# Altium PCB node.PcbDoc
Units mil, origin at the board's own origin, x right, y up, seen from the top; angles counter-clockwise.
Board outline 3500 x 1980 mil, 2 copper layers (Top Layer, Bottom Layer); 35 components, 21 nets, 172 pads, 74 vias.
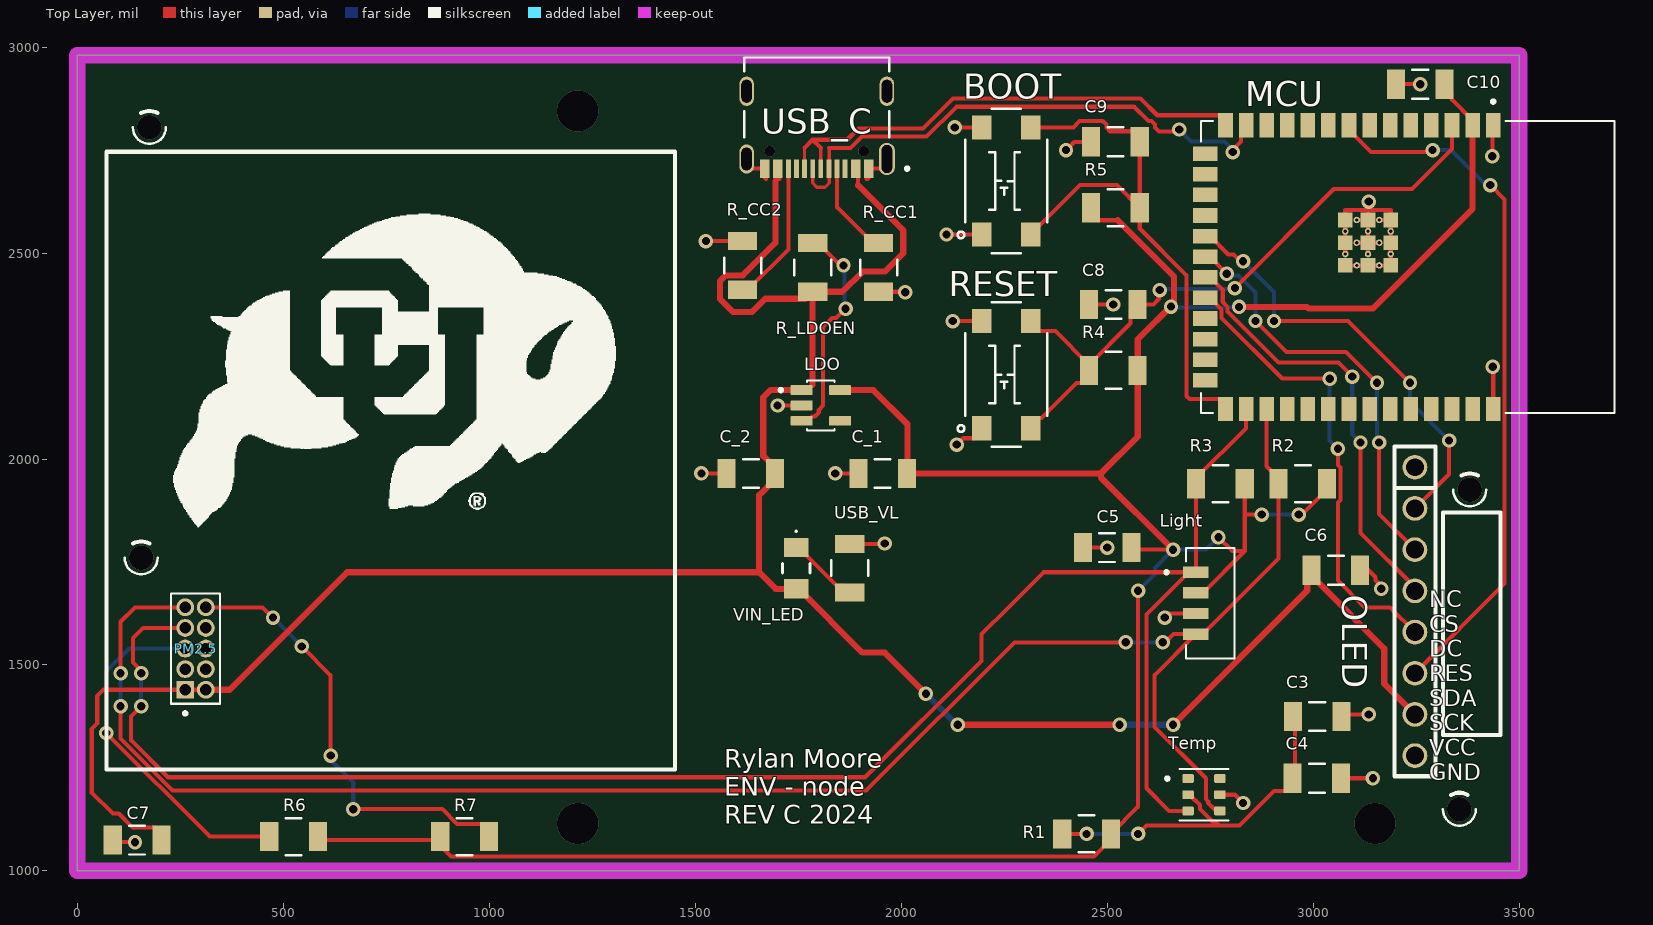
[diagram p0: Top Layer view]
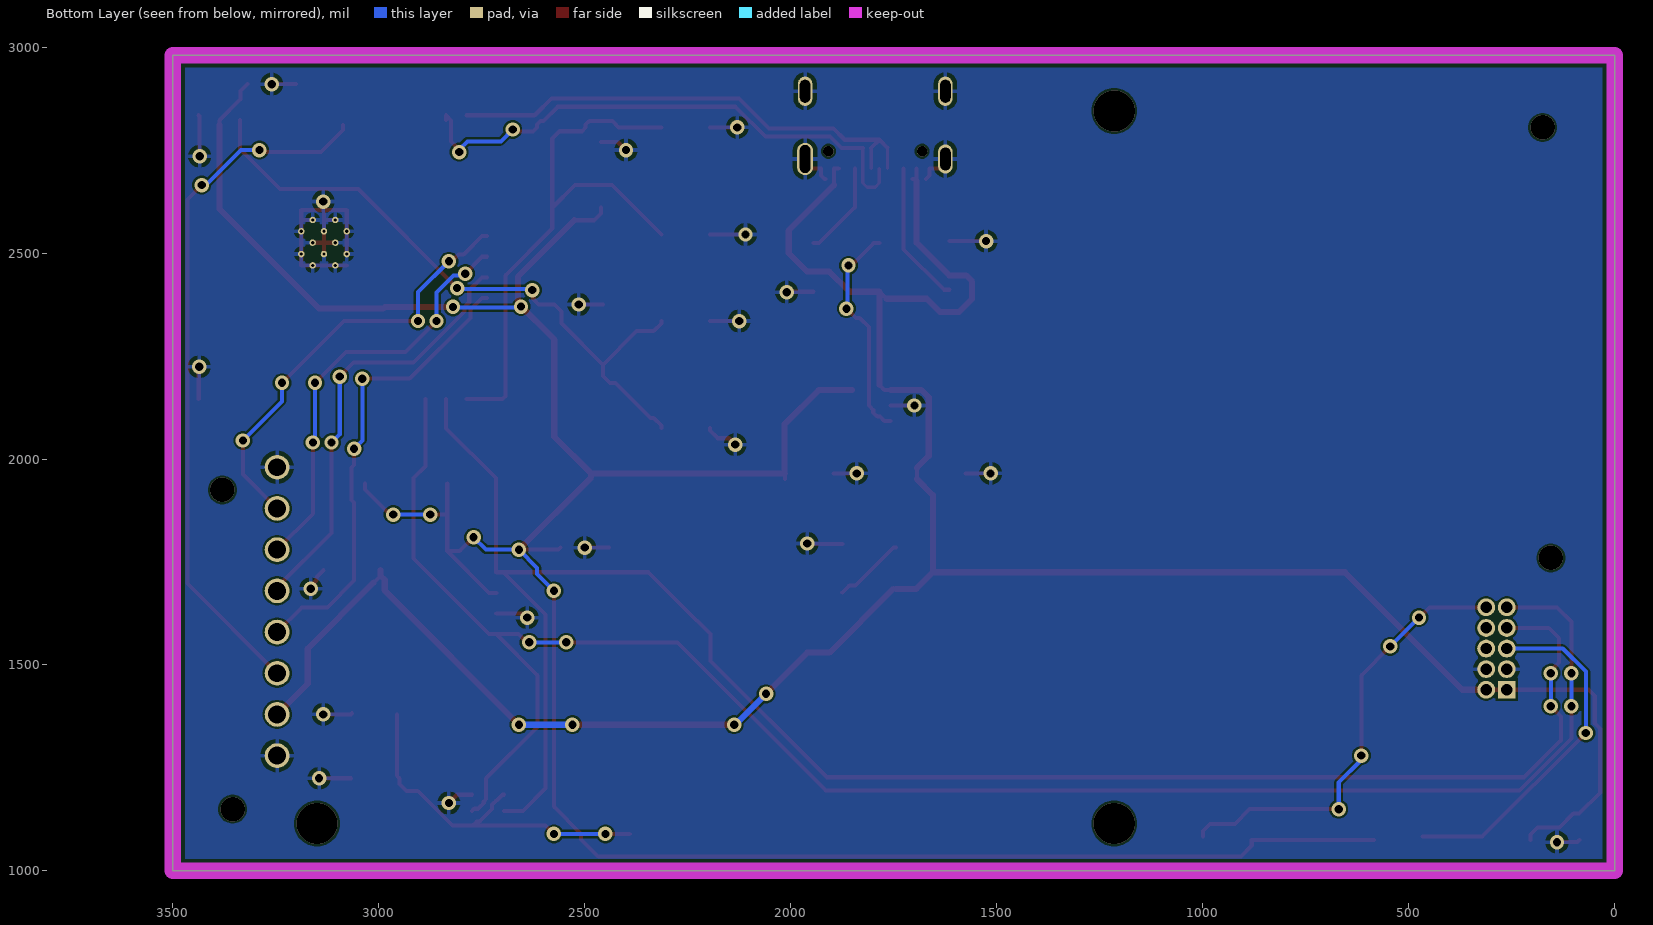
[diagram p1: Bottom Layer view, seen from below]
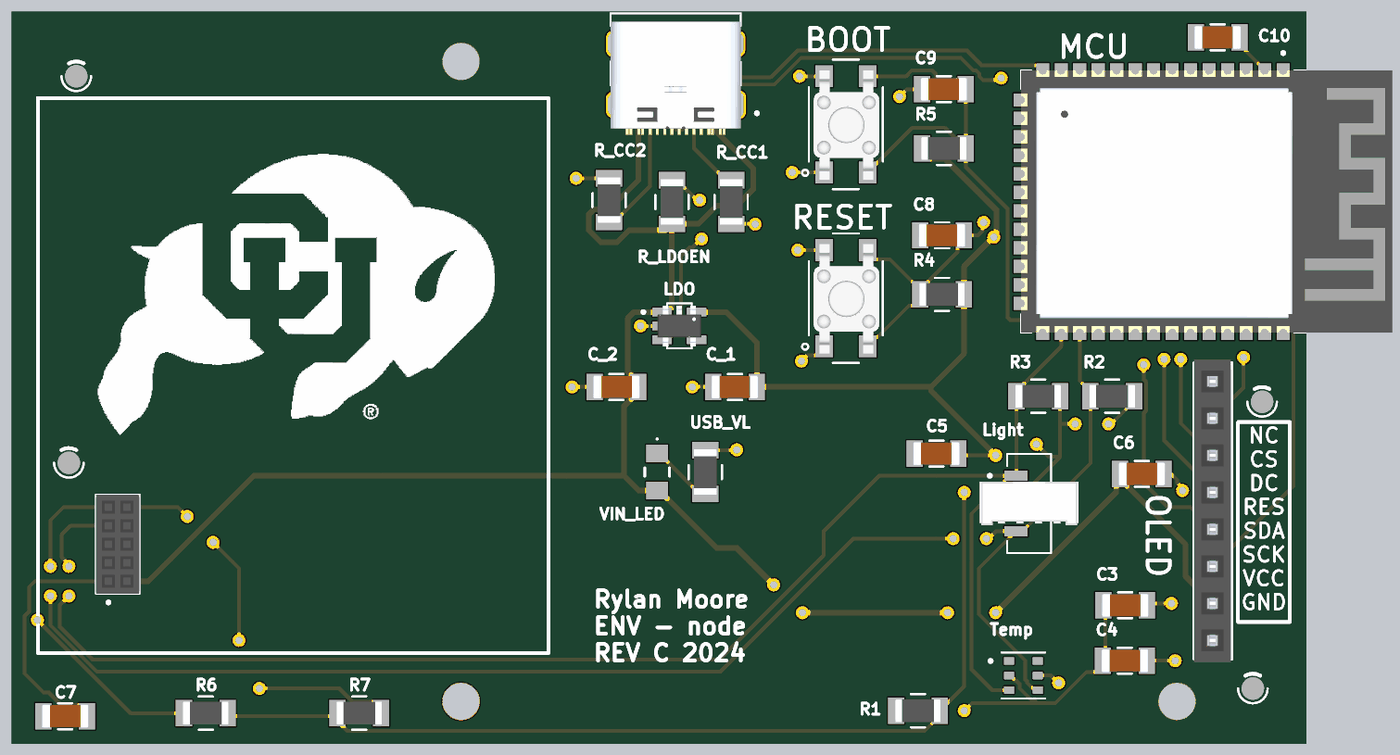
[diagram p2: 3D render of the assembled board from above, using the file's embedded part models]

## Layer stack, top to bottom
Top Solder: solder mask 0.4, Solder Resist, Dk 3.5
Top Layer: signal copper 1.4
Dielectric 1: dielectric 12.6, FR-4, Dk 4.8
Bottom Layer: signal copper 1.4
Bottom Solder: solder mask 0.4, Solder Resist, Dk 3.5

## Board outline
0,1000 3500,1000 3500,2980 0,2980

## Design rules (kind name [scope] priority, off if disabled: settings)
Clearance Clearance_1 [OnMid vs OnMid] p1: gap=5 ignorepadtopadclearanceinfootprint=FALSE sourcerule=38 cellrowname=All cellrowtype=0 cellcolname=All cellcoltype=0 innerlayers=TRUE
Clearance Clearance_2 [(ExistsOnLayer('Top Layer') Or ExistsOnLayer('Bottom Layer')) vs (ExistsOnLayer('Top Layer') Or ExistsOnLayer('Bottom Layer'))] p2: gap=5 ignorepadtopadclearanceinfootprint=FALSE sourcerule=38 cellrowname=All cellrowtype=0 cellcolname=All cellcoltype=0 outerlayers=TRUE
Clearance [All] p3: gap=10 ignorepadtopadclearanceinfootprint=FALSE ismatrix=TRUE
PolygonConnect [All] p1: connectstyle=Relief reliefconductorwidth=10 reliefentries=4 polygonreliefangle="90 Angle" airgapwidth=10
RoutingVias RoutingViaStyle_1 [All] p1: holewidth=15 width=22 viastyle="Through Hole" minholewidth=10 minwidth=10 maxholewidth=30 maxwidth=40
RoutingVias [All] p2: holewidth=28 width=50 viastyle="Through Hole" minholewidth=28 minwidth=50 maxholewidth=28 maxwidth=50
SolderMaskExpansion [All] p1: expansion=4 istentingtop=FALSE
Width MaxMinWidth_1 [All] p1: maxlimit=20 minlimit=6 preferedwidth=10 minimp=50.000000 maximp=50.000000 favimp=50.000000
Width [All] p2: maxlimit=10 minlimit=10 preferedwidth=10
30 further rules are at their usual default settings.

## Components (designator, comment, footprint, x,y, rotation, side; value= is the part's Value field where it differs from the comment)
BOOT "TL3305AF160QG" Switch_JLC 2255,2675 r90 top
C3 "10uF" 1206_Passive_Capacitor 3010,1375 r0 top
C4 "10uF" 1206_Passive_Capacitor 3009,1225 r0 top value=0.1uF
C5 "10uF" 1206_Passive_Capacitor 2500,1785 r0 top value=0.1uF
C6 "10uF" 1206_Passive_Capacitor 3055,1730 r180 top value=0.1uF
C7 "10uF" 1206_Passive_Capacitor 145,1075 r0 top value=0.1uF
C8 "10uF" 1206_Passive_Capacitor 2515,2375 r0 top value=0.1uF
C9 "10uF" 1206_Passive_Capacitor 2520,2770 r0 top value=0.1uF
C10 "10uF" 1206_Passive_Capacitor 3260,2910 r0 top value=22uF
C_1 "22uF" 1206_Passive_Capacitor 1955,1965 r0 top
C_2 "22uF" 1206_Passive_Capacitor 1635,1965 r0 top
H1 "Stencil Hole" AlignmentHole_1.5mm 3380,1925 r0 top
H2 "Stencil Hole" AlignmentHole_1.5mm 175,2805 r0 top
H3 "Stencil Hole" AlignmentHole_1.5mm 155,1760 r0 top
H4 "Stencil Hole" AlignmentHole_1.5mm 3355,1150 r0 top
LDO "AP2112K-3.3TRG1" SOT95P285X140-5N 1805,2130 r0 top
Light "VEML7700-TT" XDCR_VEML7700-TT 2750.43,1650 r0 top
MCU "ESP32-S3-WROOM-1-N4R2" XCVR_ESP32-S3-WROOM-1-N4R2 3230,2466.04 r270 top
OLED "PPTC081LFBN-RC" "8_PIN_100MIL - Female" 3246.99,1980 r270 top value=Female
PM2.5 "20021311-00010T4LF" AMPHENOL_20021311-00010T4LF 287,1540 r270 top
R1 "220 Ohm" 1206_Passive_Resitor 2450,1090 r0 top
R2 "10k" 1206_Passive_Resitor 2975,1940 r0 top value=10KOhm
R3 "10k" 1206_Passive_Resitor 2775,1940 r0 top value=10KOhm
R4 "10k" 1206_Passive_Resitor 2515,2215 r0 top value=10KOhm
R5 "220 Ohm" 1206_Passive_Resitor 2520,2610 r0 top value=10kOhm
R6 "220 Ohm" 1206_Passive_Resitor 525,1083.38 r0 top value=10kOhm
R7 "220 Ohm" 1206_Passive_Resitor 940,1083.38 r0 top value=10kOhm
R_CC1 "100KOhm" 1206_Passive_Resitor 1945,2465 r90 top value=5.1KOhm
R_CC2 "100KOhm" 1206_Passive_Resitor 1615,2470 r90 top value=5.1kOhm
R_LDOEN "1 Ohm" 1206_Passive_Resitor 1785,2465 r90 top value=10kOhm
RESET "TL3305AF160QG" Switch_JLC 2255,2205 r90 top
Temp "AHT20" PSON100P300X300X110-6N 2735,1185 r0 top
USB_C "CSP-USC16-TR" VALCON_CSP-USC16-TR 1795,2705 r180 top
USB_VL "100Ohm" 1206_Passive_Resitor 1875,1735 r90 top value=1kOhm
VIN_LED "CD1206-S01575" BOUR-CD1206-S01575-2_L 1745,1735 r90 top

## Footprints (in the part's own frame and the unit in brackets; to place one, negate y for a bottom-side part, rotate by r counter-clockwise, add the part's x,y. Pads: shape width x height; smd on the part's side, far side on the other; paste and mask are expansions set on the pad)
"8_PIN_100MIL - Female" [mil]
  round 60 hole 43.31: 1(0,0) 2(100,0) 3(200,0) 4(300,0) 5(400,0) 6(500,0) 7(600,0) 8(700,0)
  silkscreen extent -50,-50 750,50, body extent -60,-51 760,49, height 335
1206_Passive_Capacitor [mil]
  rect 44x71 smd: 1(-59,0) 2(59,0)
  silkscreen extent -19,-35 19,35, body extent -63,-31 63,32, height 50
1206_Passive_Resitor [mil]
  rect 44x71 smd: 1(-59,0) 2(59,0)
  silkscreen extent -19,-45 19,45, body extent -61,-31 61,31, height 26
AlignmentHole_1.5mm [mm]
  round 1.55 on Top Paste paste+0 mask+0: 1(0,0)
  silkscreen extent -1.02,-1.01 1.02,1.01
AMPHENOL_20021311-00010T4LF [mm]
  rect 1.1x1.1 hole 0.7: 1(2.54,-0.635)
  round 1.1 hole 0.7: 2(2.54,0.635) 3(1.27,-0.635) 4(1.27,0.635) 5(0,-0.635) 6(0,0.635) 7(-1.27,-0.635) 8(-1.27,0.635) 9(-2.54,-0.635) 10(-2.54,0.635)
  silkscreen extent -3.4,-1.5 4.1,1.5, body extent -3.4,-1.5 3.4,1.5, height 4.4
BOUR-CD1206-S01575-2_L [mm] "Molded Diode, 2-Leads, Body 3.4x1.7mm, IPC High Density"
  rect 1.2x1.5 smd: 1(-1.275,0) 2(1.275,0)
  silkscreen extent -0.28,-0.85 2.32,0.85, body extent -1.7,-0.85 1.7,0.85, height 0.95
PSON100P300X300X110-6N [mm]
  rrect25% 0.71x0.53 smd: 1(-0.985,1) 2(-0.985,0) 3(-0.985,-1) 4(0.985,-1) 5(0.985,0) 6(0.985,1)
  silkscreen extent -2.35,-1.59 1.5,1.59
SOT95P285X140-5N [mm]
  rrect15% 1.35x0.6 smd: 1(-1.185,0.95) 2(-1.185,0) 3(-1.185,-0.95) 4(1.185,-0.95) 5(1.185,0.95)
  silkscreen extent -2.57,-1.55 0.85,1.55, body extent -1.5,-1.4 1.5,1.4, height 1.4
Switch_JLC [mm]
  rect 1.5x1.2 smd: 1(-3.3,1.5) 2(3.3,1.5) 3(-3.3,-1.5) 4(3.3,-1.5)
  silkscreen extent -4.44,-2.54 4.45,3, body extent -3.8,-2.29 3.7,2.21, height 3.7
VALCON_CSP-USC16-TR [mm]
  rect 0.3x1.14 smd: A1(-3.35,0) A4(-2.55,0) A5(-1.25,0) A6(-0.25,0) A7(0.25,0) A8(1.25,0) A9(2.55,0) A12(3.35,0) B1(3.05,0) B4(2.25,0) B5(1.75,0) B6(0.75,0) B7(-0.75,0) B8(-1.75,0) B9(-2.25,0) B12(-3.05,0)
  oval 1x2 hole 0.65 slot 1.72 at 90 deg: S1(-4.325,-0.59)
  oval 0.9x1.8 hole 0.65 slot 1.4 at 90 deg: S2(4.325,-0.59) S3(-4.325,-4.77) S4(4.325,-4.77)
  round 0.65 hole 0.65 unplated: ""(-2.89,-1.07) ""(2.89,-1.07)
  silkscreen extent -5.68,-6.86 4.47,0.1, body extent -4.47,-6.28 4.47,1.47, height 3.26
XCVR_ESP32-S3-WROOM-1-N4R2 [mm]
  rect 1.5x0.9 smd: 1(-8.75,5.26) 2(-8.75,3.99) 3(-8.75,2.72) 4(-8.75,1.45) 5(-8.75,0.18) 6(-8.75,-1.09) 7(-8.75,-2.36) 8(-8.75,-3.63) 9(-8.75,-4.9) 10(-8.75,-6.17) 11(-8.75,-7.44) 12(-8.75,-8.71) 13(-8.75,-9.98) 14(-8.75,-11.25) 27(8.75,-11.25) 28(8.75,-9.98) 29(8.75,-8.71) 30(8.75,-7.44) 31(8.75,-6.17) 32(8.75,-4.9) 33(8.75,-3.63) 34(8.75,-2.36) 35(8.75,-1.09) 36(8.75,0.18) 37(8.75,1.45) 38(8.75,2.72) 39(8.75,3.99) 40(8.75,5.26)
  rect 0.9x1.5 smd: 15(-6.985,-12.5) 16(-5.715,-12.5) 17(-4.445,-12.5) 18(-3.175,-12.5) 19(-1.905,-12.5) 20(-0.635,-12.5) 21(0.635,-12.5) 22(1.905,-12.5) 23(3.175,-12.5) 24(4.445,-12.5) 25(5.715,-12.5) 26(6.985,-12.5)
  rect 0.9x0.9 smd: 41_1(-1.5,-2.46) 41_2(-2.9,-2.46) 41_3(-0.1,-2.46) 41_4(-2.9,-3.86) 41_5(-1.5,-3.86) 41_6(-0.1,-3.86) 41_7(-2.9,-1.06) 41_8(-1.5,-1.06) 41_9(-0.1,-1.06)
  round 0.4 hole 0.2 mask+0: 41_10(-1.5,-1.76) 41_11(-2.9,-1.76) 41_12(-0.1,-1.76) 41_13(-2.9,-3.16) 41_14(-1.5,-3.16) 41_15(-0.1,-3.16) 41_16(-2.2,-1.06) 41_17(-0.8,-1.06) 41_18(-2.2,-2.46) 41_19(-0.8,-2.46) 41_20(-2.2,-3.86) 41_21(-0.8,-3.86)
  silkscreen extent -10.3,-12.75 9,12.75, body extent -9,-12.75 9,12.75, height 3.25
XDCR_VEML7700-TT [mm]
  rect 1.6x0.7 smd: 1(-0.9,1.905) 2(-0.9,0.635) 3(-0.9,-0.635) 4(-0.9,-1.905)
  silkscreen extent -2.8,-3.4 1.5,3.4, body extent -3.4,-1.5 3.4,1.5, height 1.35

## Part data
BOOT RESET: library part SW_Push_Button_JLC, "Tactile Switch SPST-NO Top Actuated Surface Mount", LCSC Part#=C2837550, MFR Part #=KH-4.5X4.5X4.3H-STM, Datasheet=https://datasheet.lcsc.com/lcsc/2106081532_Shenzhen-Kinghelm-Elec-KH-4.5X4.5X4.3H-STM_C2837550.pdf, Type=Extended
C3 C4 C5 C6 C7 C8 C9 C10: library part C_10uF_1206, "10uF ±10% 50V X5R 1206 Multilayer Ceramic Capacitors MLCC - SMD/SMT RoHS", LCSC Part#=C13585, MFR Part #=CL31A106KBHNNNE, Datasheet=https://datasheet.lcsc.com/lcsc/1810221112_Samsung-Electro-Mechanics-CL31A106KBHNNNE_C13585.pdf, Type=Basic
C_1 C_2: library part C_22uF_1206, "22uF ±10% 25V X5R 1206 Multilayer Ceramic Capacitors MLCC - SMD/SMT RoHS", LCSC Part#=C12891, MFR Part #=CL31A226KAHNNNE, Datasheet=https://datasheet.lcsc.com/lcsc/1811031514_Samsung-Electro-Mechanics-CL31A226KAHNNNE_C12891.pdf, Type=basic
H1 H2 H3 H4: library part H_StencilAllignment_1.5mm, "Stencil Allignment hole for use with 1.5mm pin"
LDO: "AP2112 Series 0.6 A 3.3 V Fixed Output SMT LDO Linear Regulator - SOT23-5", Package=None, Availability=Unavailable, MF="{'manufacturer': u'Diodes Inc.'}", MP=AP2112K-3.3TRG1, Price=None
Light MCU PM2.5 USB_C: Package=None, Availability=Unavailable, Price=None
  Light: MF="{'manufacturer': u'Vishay Semiconductor'}", MP=VEML7700-TT
  MCU: MF="{'manufacturer': u'Espressif Systems'}", MP=ESP32-S3-WROOM-1-N4R2
  PM2.5: MF="{'manufacturer': u'Amphenol ICC'}", MP=20021311-00010T4LF
  USB_C: MF="{'manufacturer': u'Valcon'}", MP=CSP-USC16-TR
OLED: library part JF_8_PIN_FEMALE, "8 Position Header Connector 0.100\" (2.54mm) Through Hole Tin", LCSC Part#=C27438, Digikey Link=https://www.digikey.com/product-detail/en/PPTC081LFBN-RC/S7006-ND/810147/?itemSeq=304982354, MFR Part #=PPTC081LFBN-RC, Type=Extended
R1 R5 R6 R7: library part R_0Ohm_1206, "CHIP RESISTOR - SURFACE MOUNT 0OHMS ±1% 1/4W 1206 ROHS", LCSC Part#=C17888, MFR Part #=1206W4F0000T5E, Datasheet=https://datasheet.lcsc.com/szlcsc/Uniroyal-Elec-1206W4F0000T5E_C17888.pdf, Mouser link=https://www.mouser.com/ProductDetail/Royalohm/1206W4F0000T5E?qs=e8oIoAS2J1Thbopin%252BsagQ%3D%3D, Type=Basic
R2 R3 R4: library part R_10KOhm_1206, "10 kOhms ±5% 0.25W, 1/4W Chip Resistor 1206 (3216 Metric) Automotive AEC-Q200 Thick Film", LCSC Part#=C17902, MFR Part #=RMCF1206FT10K0, Digikey Link=https://www.digikey.com/en/products/detail/stackpole-electronics-inc/RMCF1206FT10K0/1759669, Type=Basic
R_CC1 R_CC2: library part R_100KOhm_1206, "100kΩ ±1% 0.25W ±100ppm/℃ 1206 Chip Resistor - Surface Mount RoHS", LCSC Part#=C17900, MFR Part #=1206W4F1003T5E, Datasheet=https://datasheet.lcsc.com/lcsc/1810301421_UNI-ROYAL-Uniroyal-Elec-1206W4F1003T5E_C17900.pdf, Type=Basic
R_LDOEN: library part R_1Ohm_1206, "1Ω ±5% 0.25W ±400ppm/℃ 1206 Chip Resistor - Surface Mount RoHS", LCSC Part#=C1409, MFR Part #=1206W4J010JT5E, Datasheet=https://datasheet.lcsc.com/lcsc/1810301410_UNI-ROYAL-Uniroyal-Elec-1206W4J010JT5E_C1409.pdf, Type=Extended
Temp: "Temperature and Humidity sensor", Package=None, Availability=Unavailable, MF="{'manufacturer': u'Asair'}", MP=AHT20, Price=None
USB_VL: library part R_100Ohm_1206, "100Ω ±1% 0.25W ±100ppm/℃ 1206 Chip Resistor - Surface Mount RoHS", LCSC Part#=C17901, MFR Part #=1206W4F1000T5E, Datasheet=https://datasheet.lcsc.com/lcsc/2206010145_UNI-ROYAL-Uniroyal-Elec-1206W4F1000T5E_C17901.pdf, Type=Basic
VIN_LED: library part CMP-0583-00001-2, "75 V Small Signal Switching Diode, 150 mA, 2.5 uA, 1026 Molded Package, RoHS, Tape and Reel", Average Forward Current="150 mA", Capacitance Between Terminals (Max.)="3 pF", Forward Voltage (Max.)="1.00 V", Manufacturer=Bourns, Reverse Current (Max.)="2.5 uA", Reverse Voltage="75 V", ComponentLink1Description="Manufacturer URL", ComponentLink1URL=http://www.bourns.com/, ComponentLink2Description=Datasheet, ComponentLink2URL=http://www.bourns.com/data/global/pdfs/CD1206_S01575.pdf, ComponentLink3Description="Package Specification", ComponentLink3URL=http://www.bourns.com/data/global/pdfs/CD1206_S01575.pdf, DatasheetVersion="Rev. 06/11", Mounting Technology="Surface Mount", PackageDescription="2-Pin SMD, Body 3.2 x 1.5 mm", PackageReference=CD1206-S01575-2, Packing="Tape and Reel", PartNumber=CD1206-S01575, Reverse Recovery Time (Max.)="4 nS", RoHS=TRUE

## Via types
v1: diameter 35, hole 20, Top Layer to Bottom Layer, 67 vias
v2: diameter 59.06, hole 59.06, Top Layer to Bottom Layer, 4 vias
v3: diameter 100, hole 100, Top Layer to Bottom Layer, 3 vias

## Nets (pads, with @x,y where several pads share a name; then routed paths per layer and width w, separated by ;. In a path a pad name is that pad's centre, name@x,y a point inside that pad or via, vN(x,y) a via of type N, cw(c..) or ccw(c..) an arc to the next point about the centre after c; other vN are vias at no path point)
3.3V: C5.2 C10.2 C_1.2 LDO.5 Light.2 MCU.2 R1.2 R2.2 R3.2 R4.2 R5.1 R6.2 R7.1 | length 6656.4
  Top Layer w10: R6.2@584,1075 881,1075 881,1061.5 907.5,1035 2467.5,1035 2509,1076.5 R1.2 2575,1156 v1(2575,1680) ; C_1.2@2014,1951.5 C_1.2 C_1.2@2015,1966 ; R5.1 2461,2596.5 2478,2579.5 2525.5,2579.5 ; C5.2 2564,1780 v1(2660,1780) ; Light.2 2732.72,1675 2834,1776.28 ; v1(2770,1810) 2803.72,1776.28 2834,1776.28 ; R3.2 2834,1865 ; v1(2875,1865) 2834,1865 ; v1(2965,1865) 2972.5,1865 3034,1926.5 R2.2 ; C10.2 3336,2893 3336,2873.43 3387.09,2822.34 MCU.2 ; 2834,1776.28 2834,1865
  Top Layer w15: LDO.5 1932.6,2167.4 2015,2085 C_1.2@2015,1966 ; C_1.2 2485,1965 ; 2525.5,2579.5 2662.5,2442.5 2662.5,2378.73 2574,2290.23 R4.2 2574,2054 2485,1965 ; v1(2660,1780) 2485,1955 2485,1965 ; v1(2819.9,2369.12) 2985.01,2369.12 2989.13,2365 3145,2365 3387.09,2607.09 MCU.2
  Bottom Layer w10: v1(2575,1680) 2615.81,1720.81 2615.81,1735.81 v1(2660,1780) 2740,1780 v1(2770,1810) ; v1(2655,2370) 2657.5,2367.5 2818.28,2367.5 v1(2819.9,2369.12) ; v1(2875,1865) v1(2965,1865)
BOOT: BOOT.3 BOOT.4 C9.2 MCU.27 R5.2 | length 1401.4
  Top Layer w10: BOOT.3 2433.98,2665 2524,2665 R5.2 ; BOOT.4 2418.14,2804.92 2424,2810.78 2424,2811.71 2432.79,2820.5 2489.21,2820.5 2498,2811.71 2498,2804.64 2507.14,2795.5 2562,2795.5 2579,2778.5 C9.2 R5.2 ; MCU.27@2787.09,2145.51 2699.49,2145.51 2692.5,2152.5 2692.5,2446 2579,2559.5 R5.2
D+: MCU.14 USB_C.A6 USB_C.B6 | length 1216.6
  Top Layer w8: USB_C.B6 1765.47,2755.47 ; USB_C.A6 1804.84,2755.16
  Top Layer w10: 1765.47,2755.47 1785,2775 ; 1804.84,2755.16 1785,2775 ; MCU.14@2787.09,2834.49 2621.51,2834.49 2581,2875 2125.75,2875 2053.35,2802.6 1896.66,2802.6 1869.06,2775 1785,2775
D-: MCU.13 USB_C.A7 USB_C.B7 | length 1369
  Top Layer w8: USB_C.A7 1785,2704.84 1785,2670 1795,2660 1815,2660 1825,2670 1825,2755
  Top Layer w10: 1825,2755 1877.35,2755 1904.94,2782.6 2061.64,2782.6 2134.04,2855 2565.64,2855 2600.14,2820.5 2607.21,2820.5 2616,2811.71 2616,2804.64 2625.68,2794.96 2669.96,2794.96 v1(2674.98,2799.98) v1@2680,2805 ; v1(2805,2745) 2805,2751.76 2824.37,2771.13 2824.37,2821.77 2837.09,2834.49 MCU.13@2837.09,2822.68
  Bottom Layer w10: v1(2674.98,2799.98) 2703.88,2771.08 2785.12,2771.08 2805,2751.2 v1(2805,2745)
DS_CLK: MCU.8 OLED.6 | length 1694.7
  Top Layer w10: MCU.8 3087.09,2798.72 3140.8,2745 v1@3300,2745 ; OLED.6 3464.8,1697.81 3464.8,2630.2 v1(3430,2665)
  Bottom Layer w10: v1(3290,2750) 3335,2750 v1@3415,2670
DS_CS: MCU.19 OLED.2 | length 1064.3
  Top Layer w10: MCU.19 2749.68,2541.04 2793.85,2496.88 2806.36,2496.88 2823.24,2480 v1(2830,2480) ; v1(2905,2335) 3085,2335 v1(3235,2185) ; OLED.2 3330,1963.01 v1(3330,2045)
  Bottom Layer w10: v1(2830,2480) 2905,2405 v1(2905,2335) ; v1(3235,2185) 3235,2140 v1(3330,2045)
DS_DATA: MCU.22 OLED.5 | length 1130.4
  Top Layer w10: MCU.22 2749.68,2391.04 2765.51,2375.22 2765.51,2374.8 2777.4,2362.9 2777.4,2342.6 2925,2195 v1(3040,2195) ; v1(3060,2025) 3060,1985.64 3066,1979.64 3066,1900.36 3060,1894.36 3060,1705 3125.04,1639.96 3187.03,1639.96 OLED.5
  Bottom Layer w10: v1(3040,2195) 3040,2045 v1@3055,2030
DS_DC: MCU.20 OLED.3 | length 1022.8
  Top Layer w10: MCU.20 2749.68,2491.04 2790,2450.73 v1(2790,2450) ; v1(2860,2335) 2935,2260 3080,2260 v1(3155,2185) ; v1(3160,2040) 3160,1866.99 OLED.3
  Bottom Layer w10: v1(2790,2450) 2794.78,2445.22 2818.67,2445.22 2860,2403.89 v1(2860,2335) ; v1(3155,2185) 3155,2050 v1@3160,2045
DS_RS: MCU.21 OLED.4 | length 1056.6
  Top Layer w10: MCU.21 2749.68,2441.04 2780.51,2410.22 2780.51,2381.01 2792.4,2369.11 2792.4,2357.73 2916.3,2233.83 3061.17,2233.83 v1(3095,2200) ; v1(3115,2040) 3115,1820.64 3246.99,1688.65 OLED.4
  Bottom Layer w10: v1(3095,2200) 3095,2060 v1@3110,2045
GND: BOOT.1 BOOT.2 C3.2 C4.2 C5.1 C6.1 C7.1 C8.1 C9.1 C10.1 C_1.1 C_2.1 LDO.2 Light.3 MCU.1 MCU.40 MCU.41_1 MCU.41_2 MCU.41_3 MCU.41_4 MCU.41_5 MCU.41_6 MCU.41_7 MCU.41_8 MCU.41_9 MCU.41_10 MCU.41_11 MCU.41_12 MCU.41_13 MCU.41_14 MCU.41_15 MCU.41_16 MCU.41_17 MCU.41_18 MCU.41_19 MCU.41_20 MCU.41_21 OLED.1 OLED.8 PM2.5.3 PM2.5.4 R_CC1.1 R_CC2.2 RESET.1 RESET.2 Temp.5 USB_C.A1 USB_C.A12 USB_C.B1 USB_C.B12 USB_C.S1 USB_C.S2 USB_C.S3 USB_C.S4 USB_VL.2 | length 2404.4
  Top Layer w10: C7.1 91,1070 v1(140,1070) ; v1(1515,1965) C_2.1 ; v1@1525,2530 v1(1526,2529) R_CC2.2 ; USB_C.S2 1624.72,2717.39 1637.12,2705 USB_C.A12 1663.11,2688.46 1671.57,2680 1672.11,2680 ; v1(1700,2130) LDO.2 ; v1(1840,1965) C_1.1 ; USB_VL.2 1959,1794 v1(1960,1795) ; 1915.39,2680 1918.43,2680 1926.89,2688.46 USB_C.A1 1951.71,2705 1965.28,2718.57 USB_C.S1 ; R_CC1.1 2009,2406 v1(2010,2405) ; v1@2120,2545 2120.08,2545.08 BOOT.1 ; v1@2125,2335 v1(2125.08,2334.92) RESET.2 ; v1(2130,2805) 2130.08,2804.92 BOOT.2 ; v1(2135,2035) 2150.55,2050.55 2177.32,2050.55 2195.94,2069.17 RESET.1 ; v1(2400,2750) 2420,2770 C9.1 ; C5.1 v1(2500,1785) ; C8.1 v1(2515,2375) ; v1(2640,1615) 2650,1625 Light.3 ; Temp.5 2810,1185 v1(2830,1165) ; C3.2@3065,1382.86 3067.86,1380 v1(3135,1380) ; C4.2 v1(3145,1225) ; MCU.41_6 MCU.41_15 MCU.41_3 MCU.41_12 MCU.41_9 MCU.41_17 MCU.41_8 MCU.41_16 MCU.41_7 ; MCU.41_21 MCU.41_5@3078.03,2521.5 ; MCU.41_5 MCU.41_4 3078.03,2604.17 3133.15,2604.17 ; MCU.41_14 MCU.41_1 ; MCU.41_13 MCU.41_2 ; MCU.41_19 MCU.41_1@3133.15,2521.5 ; C6.1@3134,1730 3151,1713 3151,1705.76 3165,1691.76 v1(3165,1685) ; v1(3135,2625) 3133.15,2623.15 3133.15,2604.17 ; MCU.41_10 MCU.41_1 ; MCU.41_11 MCU.41_7 ; C10.1 v1(3260,2910) ; v1@3435,2225 3437.09,2222.91 MCU.40@3437.09,2145.51 ; v1(3435,2735) 3435,2832.4 MCU.1@3437.09,2834.49 ; MCU.41_1 MCU.41_18 MCU.41_2 ; MCU.41_2 3133.15,2604.17 ; 3133.15,2604.17 3188.27,2604.17 MCU.41_7
  other v1: 3436.04,2223.96 2110,2545
NetC3_1: C3.1 C4.1 R1.1 Temp.2 | length 893.8
  Top Layer w10: R1.1 v1(2450,1090) ; v1(2575,1090) 2595,1110 2772.39,1110 ; Temp.2 2699.76,1185 2713.7,1171.06 2714.88,1171.06 2725.2,1160.75 2725.2,1150.12 2755.12,1120.2 2762.19,1120.2 2772.39,1110 ; C3.1@2956,1380 2956,1231 C4.1 2950,1211.5 2933,1194.5 2905.46,1194.5 2820.96,1110 2772.39,1110
  Bottom Layer w10: v1(2450,1090) v1(2575,1090)
NetLDO_3: LDO.3 R_LDOEN.2 | length 539.3
  Top Layer w10: LDO.3 1773.11,2092.6 1783.7,2103.19 1790.1,2103.19 1799.92,2113.01 1799.92,2119.41 1810,2129.49 1810,2320 1832.65,2342.65 1841.39,2342.65 1863.74,2365 v1(1865,2365) ; R_LDOEN.2 1798.5,2524 1852.5,2470 v1(1860,2470)
  Bottom Layer w10: v1(1860,2470) 1862.5,2467.5 1862.5,2367.5 v1(1865,2365)
NetPM2.5_5: PM2.5.5 R6.1 | length 857.4
  Top Layer w10: v1(70,1335) 321.62,1083.38 R6.1
  Bottom Layer w10: v1(70,1335) 70,1483.89 126.11,1540 PM2.5.5@255,1540
NetPM2.5_10: PM2.5.10 R7.2 | length 1073.6
  Top Layer w10: PM2.5.10@305,1640 450,1640 v1(475,1615) ; v1(545,1545) 615,1475 v1(615,1280) ; v1(670,1150) 886.02,1150 922.14,1113.88 982,1113.88 999,1096.88 R7.2
  Bottom Layer w10: v1@480,1610 v1(545,1545) ; v1@615,1270 670,1215 v1(670,1150)
NetR_CC1_2: R_CC1.2 USB_C.A5 | length 230.7
  Top Layer w10: USB_C.A5 1844.21,2611.29 1931.5,2524 R_CC1.2
NetR_CC2_1: R_CC2.1 USB_C.B5 | length 347.9
  Top Layer w10: R_CC2.1 1628.5,2411 1726.1,2508.6 USB_C.B5
NetUSB_VL_1: USB_VL.1 VIN_LED.2 | length 175.2
  Top Layer w10: VIN_LED.2 1750.91,1785.2 1843.1,1693 1858,1693 USB_VL.1
RESET: C8.2 MCU.3 R4.1 RESET.3 RESET.4 | length 1610.9
  Top Layer w10: RESET.3 2314.05,2080.98 2332.68,2099.61 2340.61,2099.61 2425.5,2184.5 2439,2184.5 2456,2201.5 R4.1 R4.1@2456,2228.5 ; RESET.4 2314.05,2329.02 2332.68,2310.39 2374.11,2310.39 R4.1@2456,2228.5 ; v1(2627.5,2410) 2625.22,2407.72 2625.22,2388.25 2611.97,2375 C8.2 2557,2358 2557,2329.5 R4.1@2456,2228.5 ; v1(2810,2415) 3050,2655 3240,2655 3337.09,2752.09 MCU.3@3337.09,2822.68
  Bottom Layer w10: v1(2627.5,2410) 2630,2412.5 2807.5,2412.5 v1(2810,2415)
SCL: Light.1 MCU.28 PM2.5.7 R3.1 Temp.3 | length 4424.7
  Top Layer w10: v1(155,1400) 130,1375 130,1317.43 219.93,1227.5 1912.5,1227.5 2194.93,1509.93 2194.93,1574.93 2260,1640 2345,1725 Light.1@2697.28,1725 ; v1(155,1480) 155,1485.96 135,1505.96 135,1565 160,1590 PM2.5.7@255,1590 ; Temp.3 2650.23,1145.63 2595,1200.86 2595,1622.72 Light.1@2697.28,1725 ; MCU.28@2837.09,2145.51 2837.09,2074.59 2716,1953.5 R3.1 2716,1726 Light.1 Light.1@2697.28,1725
  Bottom Layer w10: v1(155,1400) v1(155,1480)
SDA: Light.4 MCU.29 PM2.5.9 R2.1 Temp.4 | length 4486.2
  Top Layer w10: v1(105,1400) 105,1321.21 231.21,1195 1915,1195 2275,1555 v1(2545,1555) ; v1(105,1480) 105,1605 140,1640 PM2.5.9@255,1640 ; v1(2635,1555) 2640.96,1555 2660.96,1575 Light.4 ; Temp.4 2768.35,1151.06 2758.94,1151.06 2745.2,1164.8 2745.2,1169.03 2739.9,1174.33 2739.9,1225.1 2615,1350 2615,1475 Light.4 ; MCU.29@2887.09,2145.51 2887.09,1982.41 2916,1953.5 R2.1 2916,1758.28 2732.72,1575 Light.4
  Bottom Layer w10: v1(105,1400) v1(105,1480) ; v1(2545,1555) v1(2635,1555)
USB_POWER: C6.2 C7.2 C_2.2 LDO.1 OLED.7 PM2.5.1 PM2.5.2 R_LDOEN.1 USB_C.A4 USB_C.A9 USB_C.B4 USB_C.B9 VIN_LED.1 | length 6312.1
  Top Layer w10: C7.2 204,1088.5 187,1105.5 134.5,1105.5 100.62,1139.38 86.38,1139.38 35,1190.75 35,1345 48.35,1358.35 48.35,1425.18 63.16,1440 PM2.5.2@305,1440 ; C_2.2@1694,1951.5 C_2.2 C_2.2@1694,1978.5 ; USB_C.A9 1694.61,2674.14 1700.46,2680 1705,2680 ; VIN_LED.1 VIN_LED.1@1750.91,1684.8 ; LDO.1 1773.11,2167.4 1785,2179.29 ; R_LDOEN.1@1768,2389 R_LDOEN.1 ; USB_C.B9 USB_C.A4 1895.39,2664.61 ; C6.2@2996,1716.5 C6.2@3013,1699.5
  Top Layer w15: PM2.5.2@305,1440 370,1440 655,1725 1655,1725 ; C_2.2@1694,1951.5 1655,1912.5 1655,1725 ; C_2.2@1694,1978.5 1665,2007.5 1665,2150 1682.4,2167.4 LDO.1 ; 1694.61,2674.14 1694.61,2524.61 1615.5,2445.5 1574.32,2445.5 1560,2431.18 1560,2388.5 1591.9,2356.6 1637.53,2356.6 1669.93,2389 R_LDOEN.1@1768,2389 ; VIN_LED.1 1695.2,1684.8 1655,1725 ; VIN_LED.1@1750.91,1684.8 1905.71,1530 1960,1530 v1(2060,1430) ; 1785,2179.29 R_LDOEN.1 1857.07,2406 1906.07,2455 1960,2455 2005,2500 2005,2555 1895.39,2664.61 ; v1(2137.5,1355) v1(2530,1355) ; v1(2660,1355) 2985.84,1680.84 2985.84,1706.34 2996,1716.5 C6.2 ; C6.2@3013,1699.5 3172.5,1540 3172.5,1454.49 OLED.7
  Bottom Layer w10: v1@2135,1355 v1(2137.5,1355) v1@2140,1355
  Bottom Layer w15: v1(2060,1430) v1@2135,1355 ; v1(2530,1355) v1(2660,1355)
pads on no net: H1.1 H2.1 H3.1 H4.1 LDO.4 MCU.4 MCU.5 MCU.6 MCU.7 MCU.9 MCU.10 MCU.11 MCU.12 MCU.15 MCU.16 MCU.17 MCU.18 MCU.23 MCU.24 MCU.25 MCU.26 MCU.30 MCU.31 MCU.32 MCU.33 MCU.34 MCU.35 MCU.36 MCU.37 MCU.38 MCU.39 PM2.5.6 PM2.5.8 Temp.1 Temp.6 USB_C. USB_C.A8 USB_C.B8
copper on no net:
  other v2: 3355,1150 155,1760 3380,1925 175,2805
  other v3: 1215,1115 3150,1115 1215,2845

## Polygon pours and split planes (outlines as drawn)
GND on Bottom Layer "GND_L02_P000" (solid, pour order 0): 0,1000 3500,1000 3500,2980 0,2980

## Keep-outs
Keep-Out Layer:
  the board outline again, w40

## Silkscreen, mask and mechanical layers (free items; w line width, h text height)
Top Overlay:
  drawing of 12 lines, arcs and shapes, not listed
  text "NC / CS / DC / RES / SDA / SCK / VCC / GND" at 3281.25,1220 h40
  text "Rylan Moore / ENV - node / REV C 2024" at 1570,1115 h45

## Text inside footprints (layer, text, board x,y; h text height)
MCU: Mechanical 13 "ANTENNA" at 3604.02,2643.21 h50 r270
USB_C: Mechanical 13 "PCB Edge" at 1876.5,2964.84 h27.56 r180